# EAGLE board motorcircuit (EAGLE 6.1)
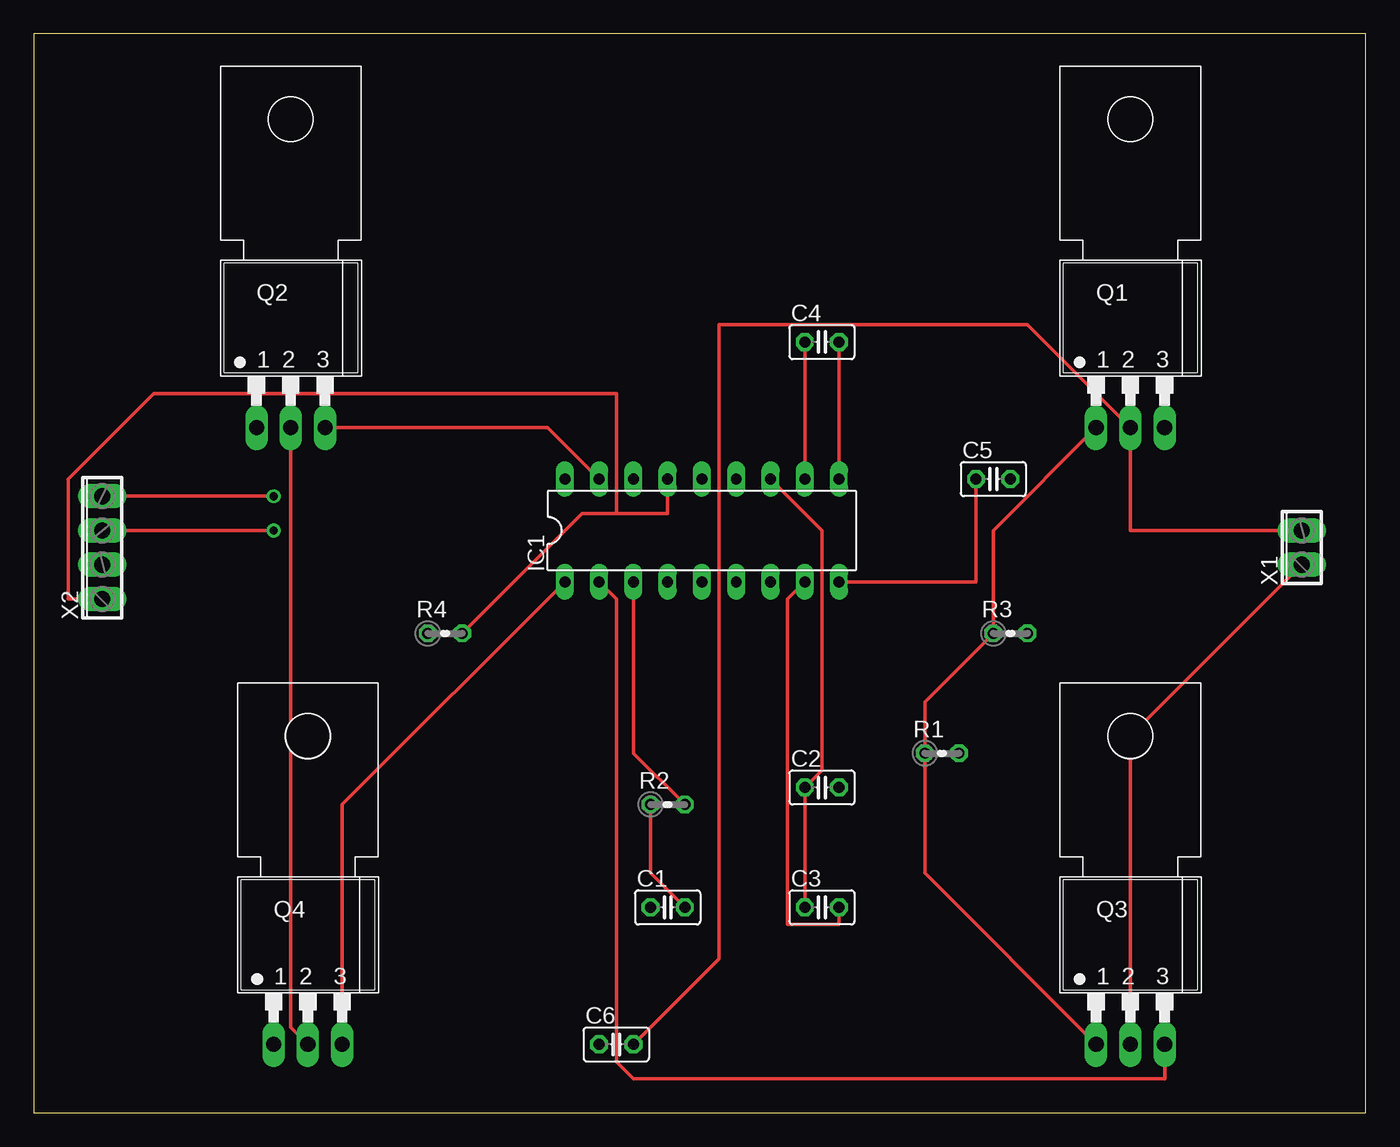
[diagram p0: board, top side]
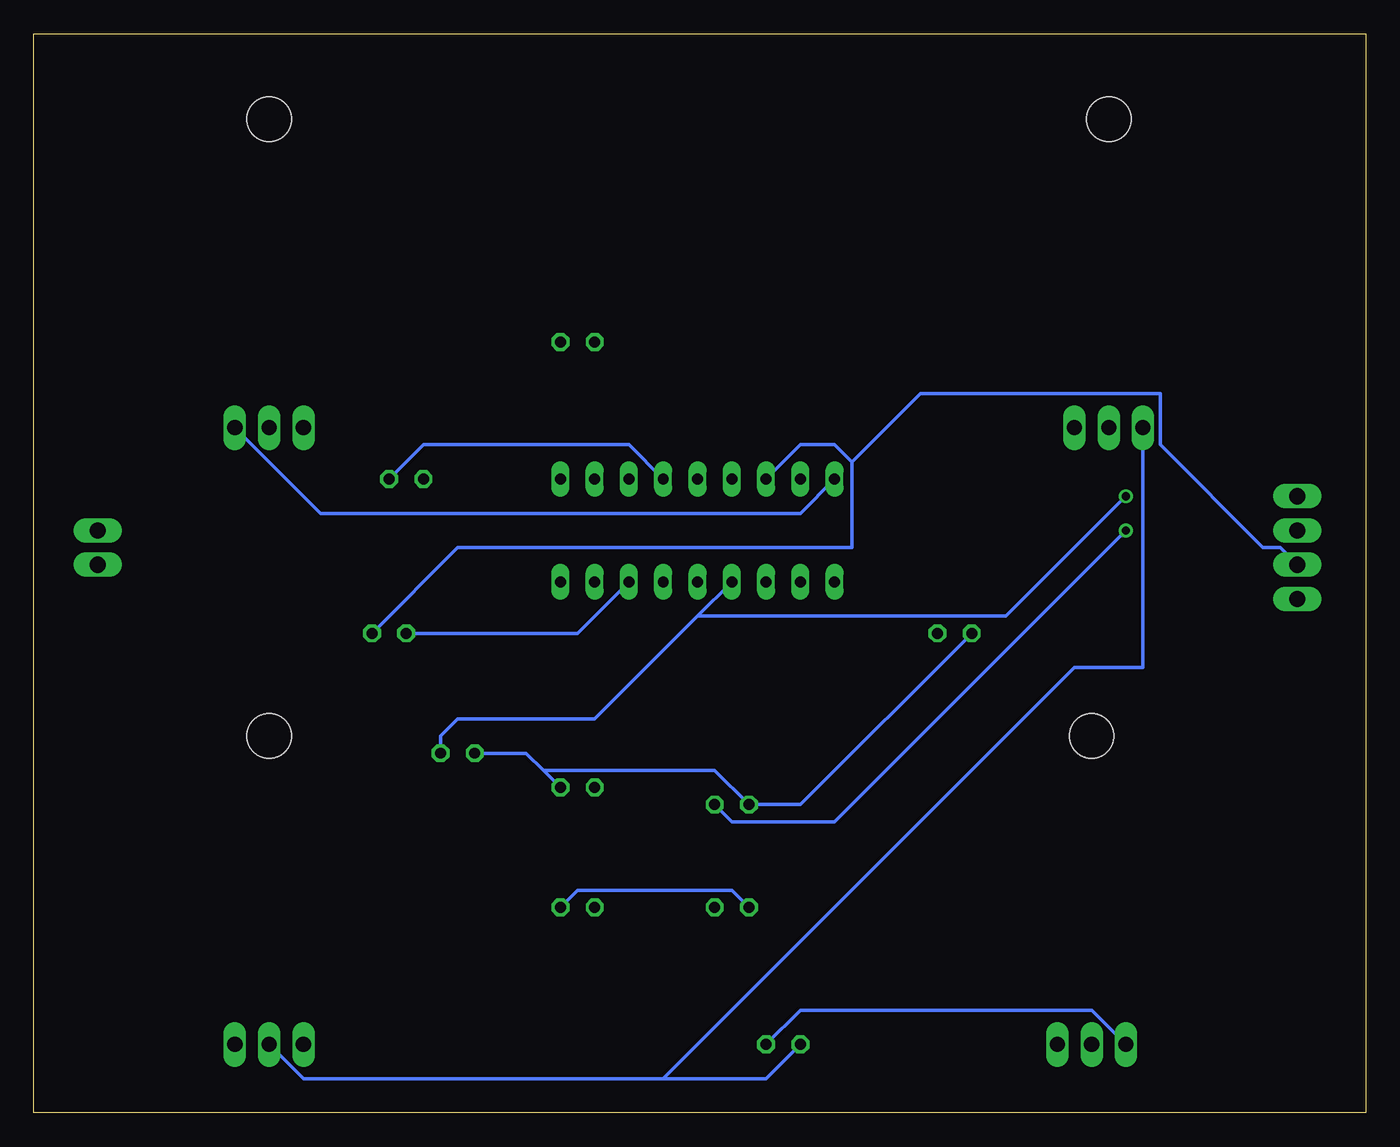
[diagram p1: board, bottom side, seen from below]

Size 98.73 x 80 mm. Coordinates in mm from the lower left corner, seen from the top.
Outline: 0,0 98.73,0 98.73,80 0,80 0,0
Copper layers (1*16): Top 0.035mm / dielectric 1.5mm / Bottom 0.035mm
Design rules: minimum track width 10mil, minimum drill 24mil, track to track 8mil, track to pad 8mil, pad to pad 8mil, via to via 8mil, smd to smd 8mil, copper to edge 40mil, drill to drill 8mil, minimum pad ring 10mil, minimum via ring 8mil, stop-mask expansion 4mil, vias tented up to drill 0mil, thermal gap 10mil

## Footprints (pad centres in the part's own frame; a part is rotated, then mirrored left to right if it is on the bottom)
C025-025X050 = drill 0.813 octagon: 1 -1.27,0; 2 1.27,0
DIL18 = drill 0.813 long: 1 -10.16,-3.81; 2 -7.62,-3.81; 3 -5.08,-3.81; 4 -2.54,-3.81; 5 0,-3.81; 6 2.54,-3.81; 7 5.08,-3.81; 8 7.62,-3.81; 9 10.16,-3.81; 10 10.16,3.81; 11 7.62,3.81; 12 5.08,3.81; 13 2.54,3.81; 14 0,3.81; 15 -2.54,3.81; 16 -5.08,3.81; 17 -7.62,3.81; 18 -10.16,3.81
TO202 = drill 1.118 long: 1 -2.54,-5.08; 2 0,-5.08; 3 2.54,-5.08 | hole 3.302: 0,17.78
0204V = drill 0.813 octagon: 1 -1.27,0; 2 1.27,0
2POL254 = drill 1.2 long: 1 -1.27,0; 2 1.27,0
4POL254 = drill 1.2 long: 1 -3.81,0; 2 -1.27,0; 3 1.27,0; 4 3.81,0

## Placement (x,y rotation side)
C1  [C025-025X050]  46.99,15.24 0 top
C2  [C025-025X050]  58.42,24.13 0 top
C3  [C025-025X050]  58.42,15.24 0 top
C4  [C025-025X050]  58.42,57.15 0 top
C5  [C025-025X050]  71.12,46.99 0 top
C6  [C025-025X050]  43.18,5.08 0 top
IC1  MAX620CPN  [DIL18]  49.53,43.18 0 top
Q1  BSS97  [TO202]  81.28,55.88 0 top
Q2  BSS97  [TO202]  19.05,55.88 0 top
Q3  BSS97  [TO202]  81.28,10.16 0 top
Q4  BSS97  [TO202]  20.32,10.16 0 top
R1  [0204V]  67.31,26.67 0 top
R2  [0204V]  46.99,22.86 0 top
R3  [0204V]  72.39,35.56 0 top
R4  [0204V]  30.48,35.56 0 top
X1  [2POL254]  93.98,41.91 90 top
X2  [4POL254]  5.08,41.91 90 top

## Library data of the parts
C1-C6 R1-R4 = resistor
IC1 = maxim; MPN: MAX620CPN+; OC_FARNELL: unknown; OC_NEWARK: 27M4142
Q1-Q4 = transistor-fet
X1 X2 = con-phoenix-254; OC_FARNELL: unknown; OC_NEWARK: unknown

## Nets
+7V: Q2.2 Q4.2
GND: C1.2 C2.2 IC1.7 Q1.1 Q3.1 R1.1 R2.1 R3.1 R4.1
N$1: IC1.18 Q1.3
N$2: IC1.17 Q2.3
N$3: IC1.2 Q3.3
N$4: IC1.1 Q4.3
N$5: IC1.3 R2.2 X2.3
N$6: IC1.4 R1.2 X2.4
N$7: C4.2 IC1.10
N$8: C4.1 IC1.11
N$9: C5.1 IC1.9
N$10: C5.2 IC1.13
N$11: IC1.16 R3.2 X2.2
N$12: IC1.15 R4.2 X2.1
N$13: C6.1 Q2.1 Q3.2 X1.1
N$14: C6.2 Q1.2 Q4.1 X1.2
V+: C1.1 C3.2 IC1.8
VCC: C2.1 C3.1 IC1.12

## Tracks (layer width: path | path; a pad name or v marks a point on that pad's centre or on a via)
+7V
  Top 0.254: Q4.2 19.05,6.35 Q2.2
GND
  Top 0.254: C1.2 45.72,17.78 R2.1 | Q3.1 66.04,17.78 R1.1 66.04,30.48 R3.1 71.12,43.18 Q1.1
  Bottom 0.254: R4.1 41.91,22.86 R2.1 48.26,25.4 60.96,25.4 | 60.96,25.4 62.23,26.67 R1.1 | 60.96,25.4 C2.2 | IC1.7 58.42,35.56 R3.1
N$1
  Bottom 0.254: IC1.18 41.91,44.45 77.47,44.45 Q1.3
N$2
  Top 0.254: IC1.17 38.1,50.8 Q2.3
N$3
  Top 0.254: IC1.2 43.18,38.1 43.18,3.81 44.45,2.54 83.82,2.54 Q3.3
N$4
  Top 0.254: IC1.1 22.86,22.86 Q4.3
N$5  (via drill 0.61)
  Top 0.254: R2.2 44.45,26.67 IC1.3 | v17.78,43.18 X2.3
  Bottom 0.254: v17.78,43.18 39.37,21.59 46.99,21.59 R2.2
N$6  (via drill 0.61)
  Top 0.254: v17.78,45.72 X2.4
  Bottom 0.254: 49.53,36.83 57.15,29.21 67.31,29.21 68.58,27.94 R1.2 | 49.53,36.83 IC1.4 | v17.78,45.72 26.67,36.83 49.53,36.83
N$7
  Top 0.254: C4.2 IC1.10
N$8
  Top 0.254: C4.1 IC1.11
N$9
  Top 0.254: IC1.9 69.85,39.37 C5.1
N$10
  Bottom 0.254: IC1.13 54.61,49.53 69.85,49.53 C5.2
N$11
  Bottom 0.254: IC1.16 41.91,49.53 39.37,49.53 38.1,48.26 | 38.1,48.26 38.1,41.91 67.31,41.91 R3.2 | X2.2 6.35,41.91 7.62,41.91 15.24,49.53 15.24,53.34 33.02,53.34 38.1,48.26
N$12
  Top 0.254: R4.2 40.64,44.45 43.18,44.45 | 43.18,44.45 46.99,44.45 IC1.15 | X2.1 2.54,38.1 2.54,46.99 8.89,53.34 43.18,53.34 43.18,44.45
N$13
  Top 0.254: X1.1 81.28,27.94 Q3.2
  Bottom 0.254: C6.1 44.45,2.54 52.07,2.54 | 52.07,2.54 78.74,2.54 Q3.2 | Q2.1 16.51,33.02 21.59,33.02 52.07,2.54
N$14
  Top 0.254: C6.2 50.8,11.43 50.8,58.42 73.66,58.42 Q1.2 81.28,43.18 X1.2
  Bottom 0.254: C6.2 41.91,7.62 20.32,7.62 Q4.1
V+
  Top 0.254: IC1.8 55.88,38.1 55.88,13.97 59.69,13.97 C3.2
  Bottom 0.254: C1.1 46.99,16.51 58.42,16.51 C3.2
VCC
  Top 0.254: C3.1 C2.1 58.42,25.4 58.42,43.18 IC1.12